# EAGLE board charliewatch-norf (EAGLE 7.7.0)
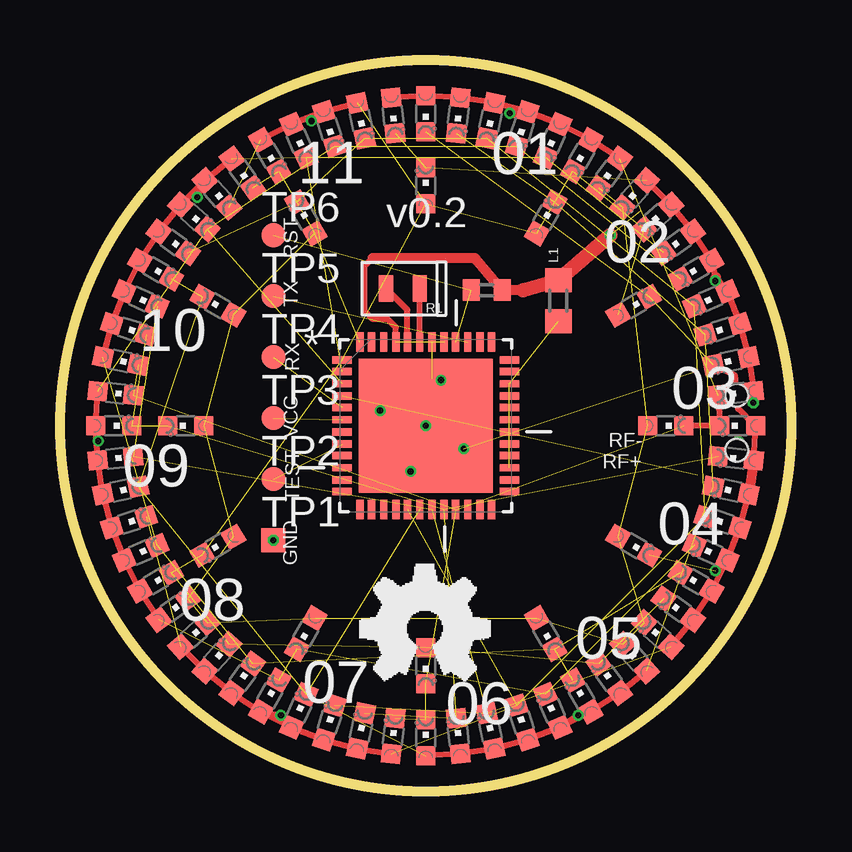
[diagram p0: board, top side]
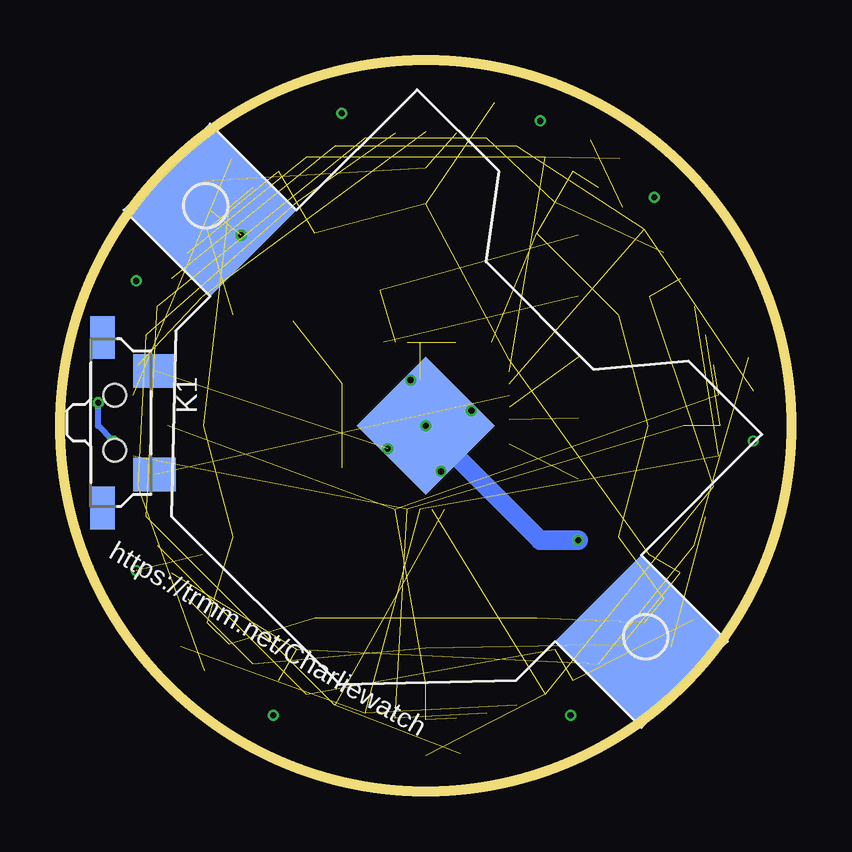
[diagram p1: board, bottom side, seen from below]

Size 30.48 x 30.48 mm. Coordinates in mm from the lower left corner, seen from the top.
Outline: circle at 15.24,15.24 radius 15.24
Copper layers (1*16): Top 0.035mm / dielectric 1.5mm / Bottom 0.035mm
Design rules "default *": minimum track width 10mil, minimum drill 10mil, track to track 5mil, track to pad 5mil, pad to pad 5mil, via to via 5mil, smd to smd 5mil, copper to edge 40mil, drill to drill 8mil, minimum pad ring 10mil, minimum via ring 4mil, stop-mask expansion 4mil, vias tented up to drill 15mil, thermal gap 10mil
Net classes: 0 default: width 0.102 mm, drill 0.025 mm, clearance 0.025 mm

## Footprints (pad centres in the part's own frame; a part is rotated, then mirrored left to right if it is on the bottom)
SW4-SMD-7.0X3.5X3.5MM-90D = smd 1.397 x 1.778: 1 -2.159,1.651; 2 2.159,1.651 | smd 1.778 x 1.016: S1 -3.556,-0.508; S2 3.556,-0.508 | hole 0.95: -1.15,0; 1.15,0
R0603 = smd 1 x 1.1: 1 -0.85,0; 2 0.85,0
CHIPLED_0603 = smd 0.8 x 0.8: A 0,-0.75; C 0,0.75
R0402 = smd 0.7 x 0.9: 1 -0.65,0; 2 0.65,0
TP10SQ = smd 1 x 1: TP 0,0
TP10R = smd 1 x 1: TP 0,0
QFN50P700X700X100-49N = smd 0.813 x 0.305: 1 -3.48,2.743; 2 -3.48,2.261; 3 -3.48,1.753; 4 -3.48,1.245; 5 -3.48,0.762; 6 -3.48,0.254; 7 -3.48,-0.254; 8 -3.48,-0.762; 9 -3.48,-1.245; 10 -3.48,-1.753; 11 -3.48,-2.261; 12 -3.48,-2.743; 25 3.48,-2.743; 26 3.48,-2.261; 27 3.48,-1.753; 28 3.48,-1.245; 29 3.48,-0.762; 30 3.48,-0.254; 31 3.48,0.254; 32 3.48,0.762; 33 3.48,1.245; 34 3.48,1.753; 35 3.48,2.261; 36 3.48,2.743 | smd 0.305 x 0.813: 13 -2.743,-3.48; 14 -2.261,-3.48; 15 -1.753,-3.48; 16 -1.245,-3.48; 17 -0.762,-3.48; 18 -0.254,-3.48; 19 0.254,-3.48; 20 0.762,-3.48; 21 1.245,-3.48; 22 1.753,-3.48; 23 2.261,-3.48; 24 2.743,-3.48; 37 2.743,3.48; 38 2.261,3.48; 39 1.753,3.48; 40 1.245,3.48; 41 0.762,3.48; 42 0.254,3.48; 43 -0.254,3.48; 44 -0.762,3.48; 45 -1.245,3.48; 46 -1.753,3.48; 47 -2.261,3.48; 48 -2.743,3.48 | smd 5.588 x 5.588: 49 0,0
CR2032-SMD = smd 5.08 x 5.08: +$1 -12.7,0; +$2 12.7,0 | smd 4.064 x 4.064: - 0,0
2.0X1.2-2PAD = smd 0.6 x 1.1: 1 -0.7,0; 2 0.7,0

## Placement (x,y rotation side)
K1  TS-1188E  [SW4-SMD-7.0X3.5X3.5MM-90D]  28.19,15.37 270 bottom
L1  [R0603]  20.76,20.45 90 top
LED0  [CHIPLED_0603]  13.88,28.17 186 top
LED1  [CHIPLED_0603]  15.24,28.24 180 top
LED2  [CHIPLED_0603]  16.6,28.17 174 top
LED3  [CHIPLED_0603]  17.94,27.96 168 top
LED4  [CHIPLED_0603]  19.26,27.6 162 top
LED5  [CHIPLED_0603]  20.53,27.12 156 top
LED6  [CHIPLED_0603]  21.74,26.5 150 top
LED7  [CHIPLED_0603]  22.88,25.76 144 top
LED8  [CHIPLED_0603]  28.17,16.6 96 top
LED9  [CHIPLED_0603]  27.96,17.94 102 top
LED10  [CHIPLED_0603]  27.6,19.26 108 top
LED11  [CHIPLED_0603]  27.12,20.53 114 top
LED12  [CHIPLED_0603]  26.5,21.74 120 top
LED13  [CHIPLED_0603]  25.76,22.88 126 top
LED14  [CHIPLED_0603]  24.9,23.94 132 top
LED15  [CHIPLED_0603]  23.94,24.9 138 top
LED16  [CHIPLED_0603]  28.24,15.24 90 top
LED17  [CHIPLED_0603]  28.17,13.88 84 top
LED18  [CHIPLED_0603]  27.96,12.54 78 top
LED19  [CHIPLED_0603]  27.6,11.22 72 top
LED20  [CHIPLED_0603]  27.12,9.95 66 top
LED21  [CHIPLED_0603]  26.5,8.74 60 top
LED22  [CHIPLED_0603]  25.76,7.6 54 top
LED23  [CHIPLED_0603]  24.9,6.54 48 top
LED24  [CHIPLED_0603]  15.24,2.24 0 top
LED25  [CHIPLED_0603]  16.6,2.31 6 top
LED26  [CHIPLED_0603]  17.94,2.52 12 top
LED27  [CHIPLED_0603]  19.26,2.88 18 top
LED28  [CHIPLED_0603]  20.53,3.36 24 top
LED29  [CHIPLED_0603]  21.74,3.98 30 top
LED30  [CHIPLED_0603]  22.88,4.72 36 top
LED31  [CHIPLED_0603]  23.94,5.58 42 top
LED32  [CHIPLED_0603]  13.88,2.31 354 top
LED33  [CHIPLED_0603]  12.54,2.52 348 top
LED34  [CHIPLED_0603]  11.22,2.88 342 top
LED35  [CHIPLED_0603]  9.95,3.36 336 top
LED36  [CHIPLED_0603]  8.74,3.98 330 top
LED37  [CHIPLED_0603]  7.6,4.72 324 top
LED38  [CHIPLED_0603]  6.54,5.58 318 top
LED39  [CHIPLED_0603]  5.58,6.54 312 top
LED40  [CHIPLED_0603]  2.31,16.6 264 top
LED41  [CHIPLED_0603]  2.24,15.24 270 top
LED42  [CHIPLED_0603]  2.31,13.88 276 top
LED43  [CHIPLED_0603]  2.52,12.54 282 top
LED44  [CHIPLED_0603]  2.88,11.22 288 top
LED45  [CHIPLED_0603]  3.36,9.95 294 top
LED46  [CHIPLED_0603]  3.98,8.74 300 top
LED47  [CHIPLED_0603]  4.72,7.6 306 top
LED48  [CHIPLED_0603]  2.52,17.94 258 top
LED49  [CHIPLED_0603]  2.88,19.26 252 top
LED50  [CHIPLED_0603]  3.36,20.53 246 top
LED51  [CHIPLED_0603]  3.98,21.74 240 top
LED52  [CHIPLED_0603]  4.72,22.88 234 top
LED53  [CHIPLED_0603]  5.58,23.94 228 top
LED54  [CHIPLED_0603]  6.54,24.9 222 top
LED55  [CHIPLED_0603]  7.6,25.76 216 top
LED56  [CHIPLED_0603]  15.24,5.24 180 top
LED57  [CHIPLED_0603]  15.24,25.24 0 top
LED58  [CHIPLED_0603]  23.9,20.24 300 top
LED59  [CHIPLED_0603]  20.24,23.9 330 top
LED60  [CHIPLED_0603]  12.54,27.96 192 top
LED61  [CHIPLED_0603]  11.22,27.6 198 top
LED62  [CHIPLED_0603]  9.95,27.12 204 top
LED63  [CHIPLED_0603]  8.74,26.5 210 top
LED64  [CHIPLED_0603]  25.24,15.24 270 top
LED65  [CHIPLED_0603]  5.24,15.24 90 top
LED66  [CHIPLED_0603]  23.9,10.24 240 top
LED67  [CHIPLED_0603]  6.58,20.24 60 top
LED68  [CHIPLED_0603]  10.24,23.9 30 top
LED69  [CHIPLED_0603]  10.24,6.58 150 top
LED70  [CHIPLED_0603]  20.24,6.58 210 top
LED71  [CHIPLED_0603]  6.58,10.24 120 top
R1  75k  [R0402]  17.78,20.89 0 top
TP1  PTR1TP10SQ  [TP10SQ]  8.89,10.48 0 top
TP2  PTR1TP10R  [TP10R]  8.89,13.02 0 top
TP3  PTR1TP10R  [TP10R]  8.89,15.56 0 top
TP4  PTR1TP10R  [TP10R]  8.89,18.1 0 top
TP5  PTR1TP10R  [TP10R]  8.89,20.64 0 top
TP6  PTR1TP10R  [TP10R]  8.89,23.18 0 top
U2  CC430F5137IRGZR  [QFN50P700X700X100-49N]  15.24,15.24 0 top
U$1  [CR2032-SMD]  15.24,15.24 315 bottom
X1  CRYSTALS-NOGND-IQXC-25  [2.0X1.2-2PAD]  14.29,20.95 180 top

## Library data of the parts
K1 = Seeed-Switch; MPN: TS-1188E
L1 R1 = rcl
LED0 LED1-LED71 = led
TP1-TP6 = testpad
U2 = Texas Instruments_By_element14_Batch_1; MPN: CC430F5137IRGZR; OC_FARNELL: -; OC_NEWARK: 68R5912; PACKAGE: QFN-48; SUPPLIER: TEXAS INSTRUMENTS
U$1 = adafruit
X1 = IQD-Frequency-Products

## Nets
AVCC: L1.1 U2.27 U2.28 U2.31 U2.32 U2.34
B0: LED0.A LED1.A LED2.A LED3.A LED4.A LED5.A LED6.A LED7.A LED8.C LED16.C LED24.C LED32.C LED40.C LED48.C LED56.C LED64.C U2.21
B1: LED0.C LED8.A LED9.A LED10.A LED11.A LED12.A LED13.A LED14.A LED15.A LED17.C LED25.C LED33.C LED41.C LED49.C LED57.C LED65.C U2.20
B2: LED1.C LED9.C LED16.A LED17.A LED18.A LED19.A LED20.A LED21.A LED22.A LED23.A LED26.C LED34.C LED42.C LED50.C LED58.C LED66.C U2.19
B3: LED2.C LED10.C LED18.C LED24.A LED25.A LED26.A LED27.A LED28.A LED29.A LED30.A LED31.A LED35.C LED43.C LED51.C LED59.C LED67.C U2.18
B4: LED3.C LED11.C LED19.C LED27.C LED32.A LED33.A LED34.A LED35.A LED36.A LED37.A LED38.A LED39.A LED44.C LED52.C LED60.C LED68.C U2.17
B5: LED4.C LED12.C LED20.C LED28.C LED36.C LED40.A LED41.A LED42.A LED43.A LED44.A LED45.A LED46.A LED47.A LED53.C LED61.C LED69.C U2.3
B6: LED5.C LED13.C LED21.C LED29.C LED37.C LED45.C LED48.A LED49.A LED50.A LED51.A LED52.A LED53.A LED54.A LED55.A LED62.C LED70.C U2.2
B7: LED6.C LED14.C LED22.C LED30.C LED38.C LED46.C LED54.C LED56.A LED57.A LED58.A LED59.A LED60.A LED61.A LED62.A LED63.A LED71.C U2.1
B8: LED7.C LED15.C LED23.C LED31.C LED39.C LED47.C LED55.C LED63.C LED64.A LED65.A LED66.A LED67.A LED68.A LED69.A LED70.A LED71.A U2.48
BSL_RST: R1.1 TP6.TP U2.40
BSL_RX: TP3.TP U2.6
BSL_TEST: TP5.TP U2.39
BSL_TX: TP4.TP U2.5
BSL_VCC: TP2.TP U2.8
BUTTON: K1.2 U2.4
DVCC_3: U2.22
GND: K1.1 TP1.TP U2.42 U2.49 U$1.-
P2.4: U2.47
P2.7: U2.23
P3.5: U2.16
P3.6: U2.15
P3.7: U2.14
R_BIAS: U2.33
RF_N: U2.30
RF_P: U2.29
RF_XIN: U2.25
RF_XOUT: U2.26
VCC: L1.2 R1.2 U2.41 U2.45 U$1.+$1
VCORE: U2.7
XIN: U2.44 X1.2
XOUT: U2.43 X1.1

## Tracks (layer width: path | path; a pad name or v marks a point on that pad's centre or on a via)
AVCC  (5 unrouted)
B0  (via drill 0.25)  (7 unrouted)
  Top 0.254: LED7.A LED6.A LED5.A LED4.A LED3.A LED2.A LED1.A LED0.A | U2.21 16.51,11.74 | LED8.C LED16.C LED64.C
  Top 0.406: v18.73,28.26 LED4.A
B1  (via drill 0.25)  (8 unrouted)
  Top 0.254: LED15.A LED14.A LED13.A LED12.A 27.33,21.45 LED11.A LED10.A LED9.A LED8.A v28.89,16.19 | LED17.C v28.26,14.61
  Top 0.406: v27.31,21.27 27.33,21.45
  Bottom 0.254: v28.26,14.61 28.89,15.24 v28.89,16.19
B2  (via drill 0.25)  (8 unrouted)
  Top 0.254: LED23.A LED22.A LED21.A LED20.A | LED20.A LED19.A LED18.A | LED17.A LED16.A 28.96,15.24 28.26,15.94 28.13,17.34 LED9.C | v27.31,9.21 LED20.A
  Top 0.406: LED17.A LED18.A
B3  (via drill 0.25)  (9 unrouted)
  Top 0.254: LED24.A LED25.A LED26.A LED27.A LED28.A | LED31.A LED30.A LED29.A LED28.A | v21.59,3.18 LED28.A
B4  (via drill 0.25)  (9 unrouted)
  Top 0.254: LED36.A LED37.A LED38.A LED39.A | LED36.A LED35.A LED34.A LED33.A LED32.A | LED36.A v9.21,3.18
B5  (via drill 0.25)  (9 unrouted)
  Top 0.254: LED41.A LED42.A LED43.A LED44.A LED45.A LED46.A LED47.A | LED41.A LED40.A | LED41.A v1.59,14.61
B6  (via drill 0.25)  (9 unrouted)
  Top 0.254: LED55.A LED54.A | LED54.A LED53.A LED52.A LED51.A LED50.A LED49.A LED48.A | LED54.A v5.72,24.77
B7  (via drill 0.25)  (13 unrouted)
  Top 0.254: LED61.A LED60.A | LED61.A LED62.A LED63.A | LED61.A v10.48,27.94
B8  (16 unrouted)
BSL_RST  (2 unrouted)
BSL_RX  (1 unrouted)
BSL_TEST  (1 unrouted)
BSL_TX  (1 unrouted)
BSL_VCC  (1 unrouted)
BUTTON  (1 unrouted)
GND  (via drill 0.25)  (2 unrouted)
  Top 0.254: 15.49,17.21 U$1.- | v13.34,15.88 U$1.- | v14.61,13.34 U$1.- | v15.88,17.15 U$1.- | v16.83,14.29 U$1.-
  Top 0.61: U$1.- 13.34,13.34 13.34,13.02
  Bottom 0.813: TP1.TP 10.48,10.48 U$1.-
  other vias: 15.24,15.24 8.89,10.48
VCC  (via drill 0.25)  (2 unrouted)
  Top 0.254: U2.45 14,19.34 13.65,19.69 13.02,19.69 12.7,20 12.7,21.91 13.02,22.23
  Top 0.406: L1.2 20.74,21.27 | 19.3,20.89 R1.2 17.3,22.23 13.02,22.23
  Top 0.61: 19.3,20.89 L1.2 v22.92,23.18
XIN
  Top 0.254: U2.44 14.48,20.06 X1.2
XOUT
  Top 0.254: U2.43 X1.1

## Text on the board
tNames: 01 | 11 | v0.2 | RST | 02 | TX | 10 | RX | 03 | VCC | RF- | RF+ | 09 | TEST | GND | 04 | 08 | 05 | 07 | 06
bNames: https://trmm.net/Charliewatch